# EAGLE board MagJack_Breakout-Panel-v12 (EAGLE 6.6.0)
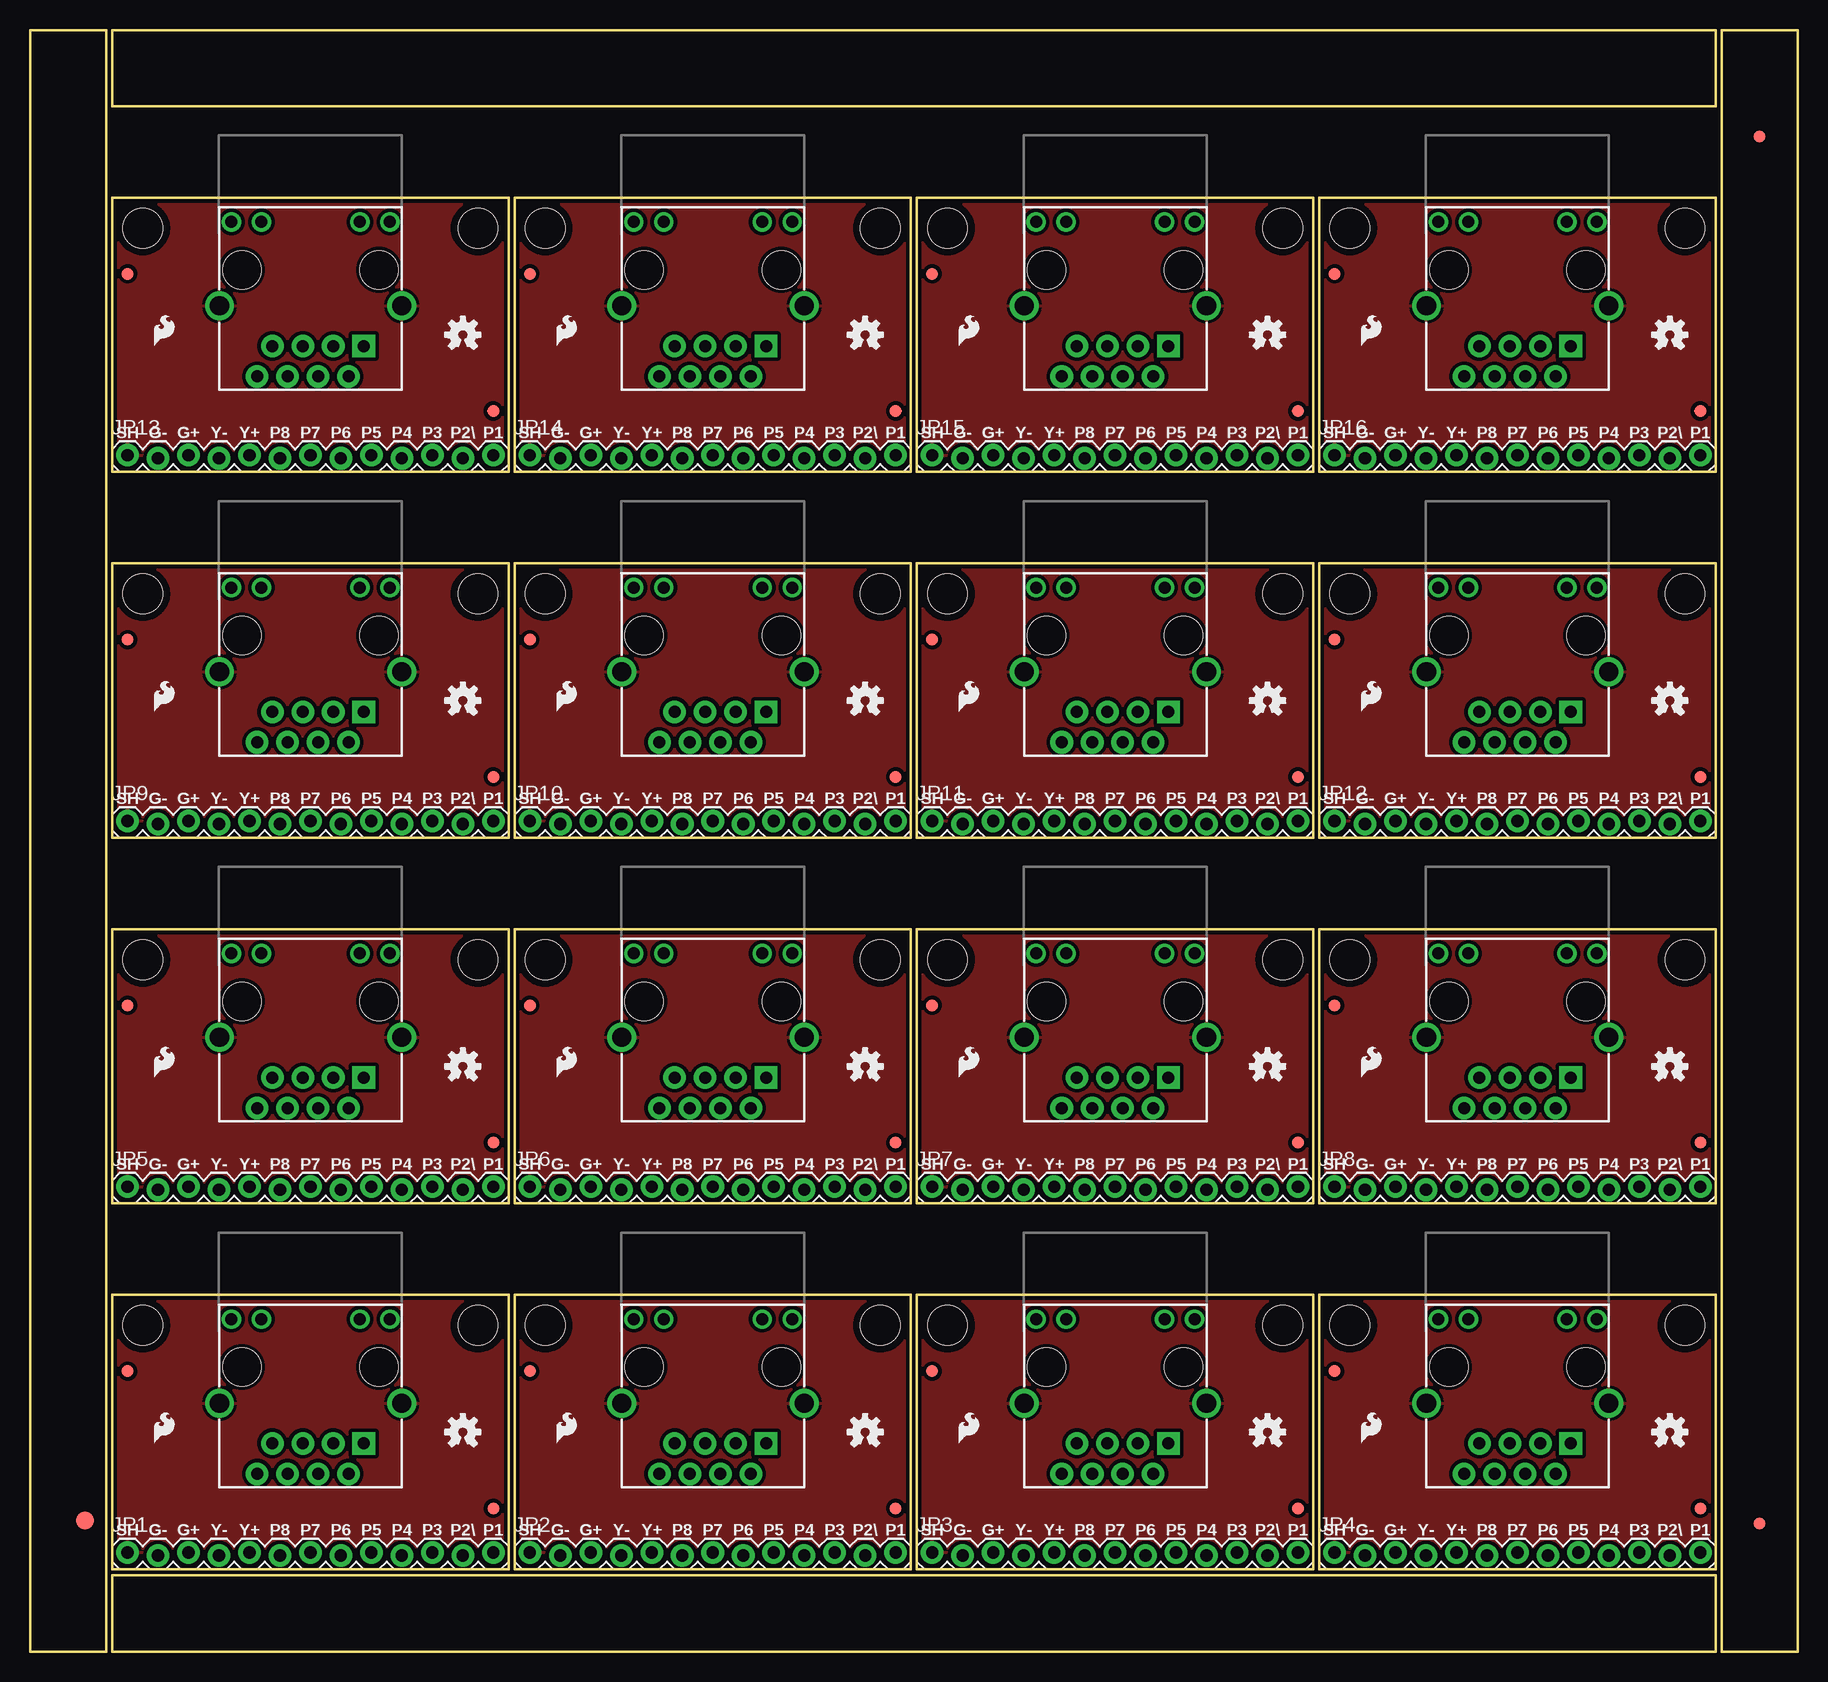
[diagram p0: board, top side]
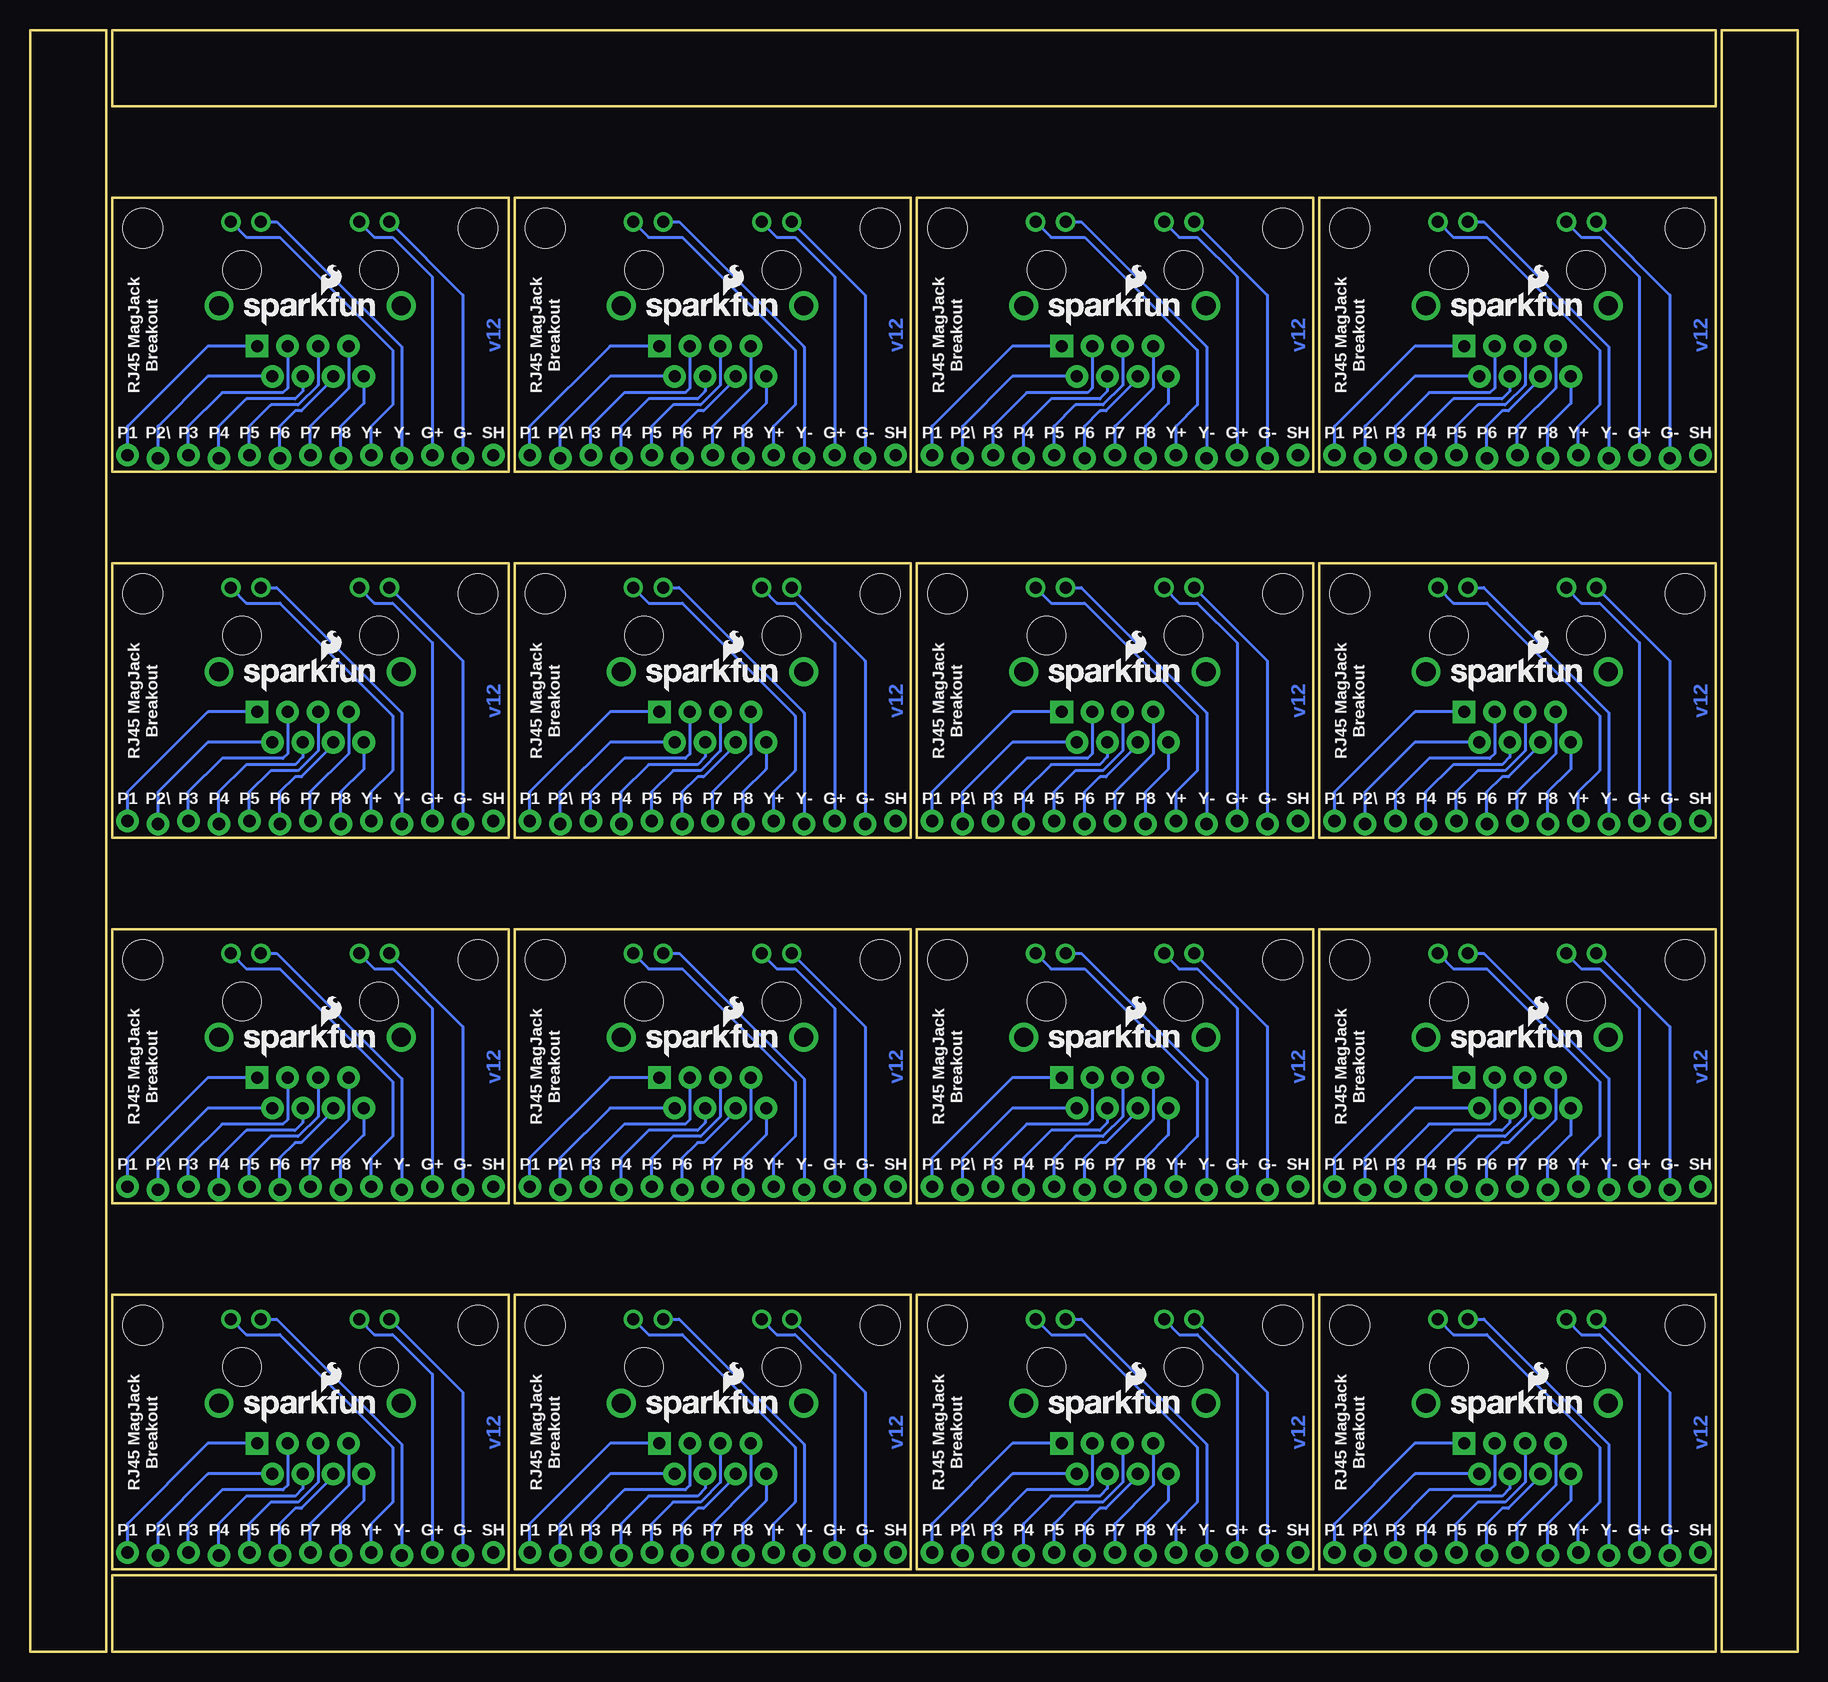
[diagram p1: board, bottom side, seen from below]

Size 147.32 x 135.13 mm. Coordinates in mm from the lower left corner, seen from the top.
Outline: 6.86,6.86 6.86,29.72 39.88,29.72 39.88,6.86 6.86,6.86
Outline: 40.39,6.86 40.39,29.72 73.41,29.72 73.41,6.86 40.39,6.86
Outline: 73.91,6.86 73.91,29.72 106.93,29.72 106.93,6.86 73.91,6.86
Outline: 107.44,6.86 107.44,29.72 140.46,29.72 140.46,6.86 107.44,6.86
Outline: 6.86,37.34 6.86,60.2 39.88,60.2 39.88,37.34 6.86,37.34
Outline: 40.39,37.34 40.39,60.2 73.41,60.2 73.41,37.34 40.39,37.34
Outline: 73.91,37.34 73.91,60.2 106.93,60.2 106.93,37.34 73.91,37.34
Outline: 107.44,37.34 107.44,60.2 140.46,60.2 140.46,37.34 107.44,37.34
Outline: 6.86,67.82 6.86,90.68 39.88,90.68 39.88,67.82 6.86,67.82
Outline: 40.39,67.82 40.39,90.68 73.41,90.68 73.41,67.82 40.39,67.82
Outline: 73.91,67.82 73.91,90.68 106.93,90.68 106.93,67.82 73.91,67.82
Outline: 107.44,67.82 107.44,90.68 140.46,90.68 140.46,67.82 107.44,67.82
Outline: 6.86,98.3 6.86,121.16 39.88,121.16 39.88,98.3 6.86,98.3
Outline: 40.39,98.3 40.39,121.16 73.41,121.16 73.41,98.3 40.39,98.3
Outline: 73.91,98.3 73.91,121.16 106.93,121.16 106.93,98.3 73.91,98.3
Outline: 107.44,98.3 107.44,121.16 140.46,121.16 140.46,98.3 107.44,98.3
Outline: 6.35,0 6.35,135.13 0,135.13 0,0 6.35,0
Outline: 6.86,0 140.46,0 140.46,6.35 6.86,6.35 6.86,0
Outline: 147.32,0 147.32,135.13 140.97,135.13 140.97,0 147.32,0
Outline: 6.86,128.78 140.46,128.78 140.46,135.13 6.86,135.13 6.86,128.78
Copper layers (1*16): Top 0.035mm / dielectric 1.5mm / Bottom 0.035mm
Design rules "SparkFun-2-layer": minimum track width 7mil, minimum drill 15mil, track to track 8mil, track to pad 8mil, pad to pad 8mil, via to via 8mil, smd to smd 8mil, copper to edge 8mil, drill to drill 8mil, minimum pad ring 12mil, minimum via ring 10mil, stop-mask expansion 4mil, vias tented up to drill 20mil, thermal gap 10mil

## Footprints (pad centres in the part's own frame; a part is rotated, then mirrored left to right if it is on the bottom)
FIDUCIAL-1.5X3 = smd 1.5 x 1.5: 1 0,0
FIDUCIAL-1X2 = smd 1 x 1: 1 0,0
MAGJACK = drill 1 pad 1.88 square: 1 3.175,17.445 | drill 1 pad 1.88: 2 4.445,19.985; 3 5.715,17.445; 4 6.985,19.985; 5 8.255,17.445; 6 9.525,19.985; 7 10.795,17.445; 8 12.065,19.985 | drill 1 pad 1.27: 9 1,7.1; 10 3.5,7.1; 11 11.7,7.1; 12 14.2,7.1 | drill 1.6 pad 2.184: M1 0,14.1; M2 15.2,14.1 | hole 3.2: 1.905,11.095; 13.335,11.095
1X13_LOCK = drill 1.016 pad 1.88: 1 0,0.127; 2 2.54,-0.127; 3 5.08,0.127; 4 7.62,-0.127; 5 10.16,0.127; 6 12.7,-0.127; 7 15.24,0.127; 8 17.78,-0.127; 9 20.32,0.127; 10 22.86,-0.127; 11 25.4,0.127; 12 27.94,-0.127; 13 30.48,0.127
STAND-OFF = hole 3.302: 0,0

## Placement (x,y rotation side)
E$1  [FIDUCIAL-1.5X3]  4.57,10.92 0 top
E$4  [FIDUCIAL-1X2]  144.15,10.67 0 top
E$7  [FIDUCIAL-1X2]  144.15,126.24 180 top
FID1  FIDUCIAL1X2  [FIDUCIAL-1X2]  8.13,23.37 0 top
FID2  FIDUCIAL1X2  [FIDUCIAL-1X2]  38.61,11.94 0 top
FID3  FIDUCIAL1X2  [FIDUCIAL-1X2]  41.66,23.37 0 top
FID4  FIDUCIAL1X2  [FIDUCIAL-1X2]  72.14,11.94 0 top
FID5  FIDUCIAL1X2  [FIDUCIAL-1X2]  75.18,23.37 0 top
FID6  FIDUCIAL1X2  [FIDUCIAL-1X2]  105.66,11.94 0 top
FID7  FIDUCIAL1X2  [FIDUCIAL-1X2]  108.71,23.37 0 top
FID8  FIDUCIAL1X2  [FIDUCIAL-1X2]  139.19,11.94 0 top
FID9  FIDUCIAL1X2  [FIDUCIAL-1X2]  8.13,53.85 0 top
FID10  FIDUCIAL1X2  [FIDUCIAL-1X2]  38.61,42.42 0 top
FID11  FIDUCIAL1X2  [FIDUCIAL-1X2]  41.66,53.85 0 top
FID12  FIDUCIAL1X2  [FIDUCIAL-1X2]  72.14,42.42 0 top
FID13  FIDUCIAL1X2  [FIDUCIAL-1X2]  75.18,53.85 0 top
FID14  FIDUCIAL1X2  [FIDUCIAL-1X2]  105.66,42.42 0 top
FID15  FIDUCIAL1X2  [FIDUCIAL-1X2]  108.71,53.85 0 top
FID16  FIDUCIAL1X2  [FIDUCIAL-1X2]  139.19,42.42 0 top
FID17  FIDUCIAL1X2  [FIDUCIAL-1X2]  8.13,84.33 0 top
FID18  FIDUCIAL1X2  [FIDUCIAL-1X2]  38.61,72.9 0 top
FID19  FIDUCIAL1X2  [FIDUCIAL-1X2]  41.66,84.33 0 top
FID20  FIDUCIAL1X2  [FIDUCIAL-1X2]  72.14,72.9 0 top
FID21  FIDUCIAL1X2  [FIDUCIAL-1X2]  75.18,84.33 0 top
FID22  FIDUCIAL1X2  [FIDUCIAL-1X2]  105.66,72.9 0 top
FID23  FIDUCIAL1X2  [FIDUCIAL-1X2]  108.71,84.33 0 top
FID24  FIDUCIAL1X2  [FIDUCIAL-1X2]  139.19,72.9 0 top
FID25  FIDUCIAL1X2  [FIDUCIAL-1X2]  8.13,114.81 0 top
FID26  FIDUCIAL1X2  [FIDUCIAL-1X2]  38.61,103.38 0 top
FID27  FIDUCIAL1X2  [FIDUCIAL-1X2]  41.66,114.81 0 top
FID28  FIDUCIAL1X2  [FIDUCIAL-1X2]  72.14,103.38 0 top
FID29  FIDUCIAL1X2  [FIDUCIAL-1X2]  75.18,114.81 0 top
FID30  FIDUCIAL1X2  [FIDUCIAL-1X2]  105.66,103.38 0 top
FID31  FIDUCIAL1X2  [FIDUCIAL-1X2]  108.71,114.81 0 top
FID32  FIDUCIAL1X2  [FIDUCIAL-1X2]  139.19,103.38 0 top
J1  MAGJACK-NOLABELS  [MAGJACK]  30.99,34.8 180 top
J2  MAGJACK-NOLABELS  [MAGJACK]  64.52,34.8 180 top
J3  MAGJACK-NOLABELS  [MAGJACK]  98.04,34.8 180 top
J4  MAGJACK-NOLABELS  [MAGJACK]  131.57,34.8 180 top
J5  MAGJACK-NOLABELS  [MAGJACK]  30.99,65.28 180 top
J6  MAGJACK-NOLABELS  [MAGJACK]  64.52,65.28 180 top
J7  MAGJACK-NOLABELS  [MAGJACK]  98.04,65.28 180 top
J8  MAGJACK-NOLABELS  [MAGJACK]  131.57,65.28 180 top
J9  MAGJACK-NOLABELS  [MAGJACK]  30.99,95.76 180 top
J10  MAGJACK-NOLABELS  [MAGJACK]  64.52,95.76 180 top
J11  MAGJACK-NOLABELS  [MAGJACK]  98.04,95.76 180 top
J12  MAGJACK-NOLABELS  [MAGJACK]  131.57,95.76 180 top
J13  MAGJACK-NOLABELS  [MAGJACK]  30.99,126.24 180 top
J14  MAGJACK-NOLABELS  [MAGJACK]  64.52,126.24 180 top
J15  MAGJACK-NOLABELS  [MAGJACK]  98.04,126.24 180 top
J16  MAGJACK-NOLABELS  [MAGJACK]  131.57,126.24 180 top
JP1  M13LOCK  [1X13_LOCK]  8.13,8.13 0 top
JP2  M13LOCK  [1X13_LOCK]  41.66,8.13 0 top
JP3  M13LOCK  [1X13_LOCK]  75.18,8.13 0 top
JP4  M13LOCK  [1X13_LOCK]  108.71,8.13 0 top
JP5  M13LOCK  [1X13_LOCK]  8.13,38.61 0 top
JP6  M13LOCK  [1X13_LOCK]  41.66,38.61 0 top
JP7  M13LOCK  [1X13_LOCK]  75.18,38.61 0 top
JP8  M13LOCK  [1X13_LOCK]  108.71,38.61 0 top
JP9  M13LOCK  [1X13_LOCK]  8.13,69.09 0 top
JP10  M13LOCK  [1X13_LOCK]  41.66,69.09 0 top
JP11  M13LOCK  [1X13_LOCK]  75.18,69.09 0 top
JP12  M13LOCK  [1X13_LOCK]  108.71,69.09 0 top
JP13  M13LOCK  [1X13_LOCK]  8.13,99.57 0 top
JP14  M13LOCK  [1X13_LOCK]  41.66,99.57 0 top
JP15  M13LOCK  [1X13_LOCK]  75.18,99.57 0 top
JP16  M13LOCK  [1X13_LOCK]  108.71,99.57 0 top
LOGO1  OSHW-LOGOS  [OSHW-LOGO-S]  36.07,18.29 0 top
LOGO2  SFE_LOGO_FLAME.1_INCH  [SFE_LOGO_FLAME_.1]  10.03,17.02 0 top
LOGO3  SFE_LOGO_NAME_FLAME.1_INCH  [SFE_LOGO_NAME_FLAME_.1]  29.34,18.92 0 bottom
LOGO4  OSHW-LOGOS  [OSHW-LOGO-S]  69.6,18.29 0 top
LOGO5  SFE_LOGO_FLAME.1_INCH  [SFE_LOGO_FLAME_.1]  43.56,17.02 0 top
LOGO6  SFE_LOGO_NAME_FLAME.1_INCH  [SFE_LOGO_NAME_FLAME_.1]  62.87,18.92 0 bottom
LOGO7  OSHW-LOGOS  [OSHW-LOGO-S]  103.12,18.29 0 top
LOGO8  SFE_LOGO_FLAME.1_INCH  [SFE_LOGO_FLAME_.1]  77.09,17.02 0 top
LOGO9  SFE_LOGO_NAME_FLAME.1_INCH  [SFE_LOGO_NAME_FLAME_.1]  96.39,18.92 0 bottom
LOGO10  OSHW-LOGOS  [OSHW-LOGO-S]  136.65,18.29 0 top
LOGO11  SFE_LOGO_FLAME.1_INCH  [SFE_LOGO_FLAME_.1]  110.62,17.02 0 top
LOGO12  SFE_LOGO_NAME_FLAME.1_INCH  [SFE_LOGO_NAME_FLAME_.1]  129.92,18.92 0 bottom
LOGO13  OSHW-LOGOS  [OSHW-LOGO-S]  36.07,48.77 0 top
LOGO14  SFE_LOGO_FLAME.1_INCH  [SFE_LOGO_FLAME_.1]  10.03,47.5 0 top
LOGO15  SFE_LOGO_NAME_FLAME.1_INCH  [SFE_LOGO_NAME_FLAME_.1]  29.34,49.4 0 bottom
LOGO16  OSHW-LOGOS  [OSHW-LOGO-S]  69.6,48.77 0 top
LOGO17  SFE_LOGO_FLAME.1_INCH  [SFE_LOGO_FLAME_.1]  43.56,47.5 0 top
LOGO18  SFE_LOGO_NAME_FLAME.1_INCH  [SFE_LOGO_NAME_FLAME_.1]  62.87,49.4 0 bottom
LOGO19  OSHW-LOGOS  [OSHW-LOGO-S]  103.12,48.77 0 top
LOGO20  SFE_LOGO_FLAME.1_INCH  [SFE_LOGO_FLAME_.1]  77.09,47.5 0 top
LOGO21  SFE_LOGO_NAME_FLAME.1_INCH  [SFE_LOGO_NAME_FLAME_.1]  96.39,49.4 0 bottom
LOGO22  OSHW-LOGOS  [OSHW-LOGO-S]  136.65,48.77 0 top
LOGO23  SFE_LOGO_FLAME.1_INCH  [SFE_LOGO_FLAME_.1]  110.62,47.5 0 top
LOGO24  SFE_LOGO_NAME_FLAME.1_INCH  [SFE_LOGO_NAME_FLAME_.1]  129.92,49.4 0 bottom
LOGO25  OSHW-LOGOS  [OSHW-LOGO-S]  36.07,79.25 0 top
LOGO26  SFE_LOGO_FLAME.1_INCH  [SFE_LOGO_FLAME_.1]  10.03,77.98 0 top
LOGO27  SFE_LOGO_NAME_FLAME.1_INCH  [SFE_LOGO_NAME_FLAME_.1]  29.34,79.88 0 bottom
LOGO28  OSHW-LOGOS  [OSHW-LOGO-S]  69.6,79.25 0 top
LOGO29  SFE_LOGO_FLAME.1_INCH  [SFE_LOGO_FLAME_.1]  43.56,77.98 0 top
LOGO30  SFE_LOGO_NAME_FLAME.1_INCH  [SFE_LOGO_NAME_FLAME_.1]  62.87,79.88 0 bottom
LOGO31  OSHW-LOGOS  [OSHW-LOGO-S]  103.12,79.25 0 top
LOGO32  SFE_LOGO_FLAME.1_INCH  [SFE_LOGO_FLAME_.1]  77.09,77.98 0 top
LOGO33  SFE_LOGO_NAME_FLAME.1_INCH  [SFE_LOGO_NAME_FLAME_.1]  96.39,79.88 0 bottom
LOGO34  OSHW-LOGOS  [OSHW-LOGO-S]  136.65,79.25 0 top
LOGO35  SFE_LOGO_FLAME.1_INCH  [SFE_LOGO_FLAME_.1]  110.62,77.98 0 top
LOGO36  SFE_LOGO_NAME_FLAME.1_INCH  [SFE_LOGO_NAME_FLAME_.1]  129.92,79.88 0 bottom
LOGO37  OSHW-LOGOS  [OSHW-LOGO-S]  36.07,109.73 0 top
LOGO38  SFE_LOGO_FLAME.1_INCH  [SFE_LOGO_FLAME_.1]  10.03,108.46 0 top
LOGO39  SFE_LOGO_NAME_FLAME.1_INCH  [SFE_LOGO_NAME_FLAME_.1]  29.34,110.36 0 bottom
LOGO40  OSHW-LOGOS  [OSHW-LOGO-S]  69.6,109.73 0 top
LOGO41  SFE_LOGO_FLAME.1_INCH  [SFE_LOGO_FLAME_.1]  43.56,108.46 0 top
LOGO42  SFE_LOGO_NAME_FLAME.1_INCH  [SFE_LOGO_NAME_FLAME_.1]  62.87,110.36 0 bottom
LOGO43  OSHW-LOGOS  [OSHW-LOGO-S]  103.12,109.73 0 top
LOGO44  SFE_LOGO_FLAME.1_INCH  [SFE_LOGO_FLAME_.1]  77.09,108.46 0 top
LOGO45  SFE_LOGO_NAME_FLAME.1_INCH  [SFE_LOGO_NAME_FLAME_.1]  96.39,110.36 0 bottom
LOGO46  OSHW-LOGOS  [OSHW-LOGO-S]  136.65,109.73 0 top
LOGO47  SFE_LOGO_FLAME.1_INCH  [SFE_LOGO_FLAME_.1]  110.62,108.46 0 top
LOGO48  SFE_LOGO_NAME_FLAME.1_INCH  [SFE_LOGO_NAME_FLAME_.1]  129.92,110.36 0 bottom
STANDOFF1  STAND-OFF  [STAND-OFF]  70.87,27.18 0 top
STANDOFF2  STAND-OFF  [STAND-OFF]  42.93,27.18 0 top
STANDOFF3  STAND-OFF  [STAND-OFF]  37.34,27.18 0 top
STANDOFF4  STAND-OFF  [STAND-OFF]  104.39,27.18 0 top
STANDOFF5  STAND-OFF  [STAND-OFF]  9.4,27.18 0 top
STANDOFF6  STAND-OFF  [STAND-OFF]  76.45,27.18 0 top
STANDOFF7  STAND-OFF  [STAND-OFF]  137.92,27.18 0 top
STANDOFF8  STAND-OFF  [STAND-OFF]  109.98,27.18 0 top
STANDOFF9  STAND-OFF  [STAND-OFF]  37.34,57.66 0 top
STANDOFF10  STAND-OFF  [STAND-OFF]  9.4,57.66 0 top
STANDOFF11  STAND-OFF  [STAND-OFF]  70.87,57.66 0 top
STANDOFF12  STAND-OFF  [STAND-OFF]  42.93,57.66 0 top
STANDOFF13  STAND-OFF  [STAND-OFF]  104.39,57.66 0 top
STANDOFF14  STAND-OFF  [STAND-OFF]  76.45,57.66 0 top
STANDOFF15  STAND-OFF  [STAND-OFF]  137.92,57.66 0 top
STANDOFF16  STAND-OFF  [STAND-OFF]  109.98,57.66 0 top
STANDOFF17  STAND-OFF  [STAND-OFF]  37.34,88.14 0 top
STANDOFF18  STAND-OFF  [STAND-OFF]  9.4,88.14 0 top
STANDOFF19  STAND-OFF  [STAND-OFF]  70.87,88.14 0 top
STANDOFF20  STAND-OFF  [STAND-OFF]  42.93,88.14 0 top
STANDOFF21  STAND-OFF  [STAND-OFF]  104.39,88.14 0 top
STANDOFF22  STAND-OFF  [STAND-OFF]  76.45,88.14 0 top
STANDOFF23  STAND-OFF  [STAND-OFF]  137.92,88.14 0 top
STANDOFF24  STAND-OFF  [STAND-OFF]  109.98,88.14 0 top
STANDOFF25  STAND-OFF  [STAND-OFF]  37.34,118.62 0 top
STANDOFF26  STAND-OFF  [STAND-OFF]  9.4,118.62 0 top
STANDOFF27  STAND-OFF  [STAND-OFF]  70.87,118.62 0 top
STANDOFF28  STAND-OFF  [STAND-OFF]  42.93,118.62 0 top
STANDOFF29  STAND-OFF  [STAND-OFF]  104.39,118.62 0 top
STANDOFF30  STAND-OFF  [STAND-OFF]  76.45,118.62 0 top
STANDOFF31  STAND-OFF  [STAND-OFF]  137.92,118.62 0 top
STANDOFF32  STAND-OFF  [STAND-OFF]  109.98,118.62 0 top

## Library data of the parts
E$1 = SparkFun-Retired
E$4 E$7 FID1-FID32 LOGO1-LOGO48 = SparkFun-Aesthetics
J1-J16 = SparkFun-Connectors; PROD_ID: CONN-09556
JP1-JP16 = SparkFun-Connectors
STANDOFF1-STANDOFF32 = SparkFun-Electromechanical

## Nets
G+: J1.11 JP1.3
G+1: J2.11 JP2.3
G+2: J3.11 JP3.3
G+3: J4.11 JP4.3
G+4: J5.11 JP5.3
G+5: J6.11 JP6.3
G+6: J7.11 JP7.3
G+7: J8.11 JP8.3
G+8: J9.11 JP9.3
G+9: J10.11 JP10.3
G+10: J11.11 JP11.3
G+11: J12.11 JP12.3
G+12: J13.11 JP13.3
G+13: J14.11 JP14.3
G+14: J15.11 JP15.3
G+15: J16.11 JP16.3
G-: J1.12 JP1.2
G-1: J2.12 JP2.2
G-2: J3.12 JP3.2
G-3: J4.12 JP4.2
G-4: J5.12 JP5.2
G-5: J6.12 JP6.2
G-6: J7.12 JP7.2
G-7: J8.12 JP8.2
G-8: J9.12 JP9.2
G-9: J10.12 JP10.2
G-10: J11.12 JP11.2
G-11: J12.12 JP12.2
G-12: J13.12 JP13.2
G-13: J14.12 JP14.2
G-14: J15.12 JP15.2
G-15: J16.12 JP16.2
P1: J1.1 JP1.13
P2: J1.2 JP1.12
P3: J1.3 JP1.11
P4: J1.4 JP1.10
P5: J1.5 JP1.9
P6: J1.6 JP1.8
P7: J1.7 JP1.7
P8: J1.8 JP1.6
P9: J2.1 JP2.13
P10: J2.2 JP2.12
P11: J2.3 JP2.11
P12: J2.4 JP2.10
P13: J2.5 JP2.9
P14: J2.6 JP2.8
P15: J2.7 JP2.7
P16: J2.8 JP2.6
P17: J3.1 JP3.13
P18: J3.2 JP3.12
P19: J3.3 JP3.11
P20: J3.4 JP3.10
P21: J3.5 JP3.9
P22: J3.6 JP3.8
P23: J3.7 JP3.7
P24: J3.8 JP3.6
P25: J4.1 JP4.13
P26: J4.2 JP4.12
P27: J4.3 JP4.11
P28: J4.4 JP4.10
P29: J4.5 JP4.9
P30: J4.6 JP4.8
P31: J4.7 JP4.7
P32: J4.8 JP4.6
P33: J5.1 JP5.13
P34: J5.2 JP5.12
P35: J5.3 JP5.11
P36: J5.4 JP5.10
P37: J5.5 JP5.9
P38: J5.6 JP5.8
P39: J5.7 JP5.7
P40: J5.8 JP5.6
P41: J6.1 JP6.13
P42: J6.2 JP6.12
P43: J6.3 JP6.11
P44: J6.4 JP6.10
P45: J6.5 JP6.9
P46: J6.6 JP6.8
P47: J6.7 JP6.7
P48: J6.8 JP6.6
P49: J7.1 JP7.13
P50: J7.2 JP7.12
P51: J7.3 JP7.11
P52: J7.4 JP7.10
P53: J7.5 JP7.9
P54: J7.6 JP7.8
P55: J7.7 JP7.7
P56: J7.8 JP7.6
P57: J8.1 JP8.13
P58: J8.2 JP8.12
P59: J8.3 JP8.11
P60: J8.4 JP8.10
P61: J8.5 JP8.9
P62: J8.6 JP8.8
P63: J8.7 JP8.7
P64: J8.8 JP8.6
P65: J9.1 JP9.13
P66: J9.2 JP9.12
P67: J9.3 JP9.11
P68: J9.4 JP9.10
P69: J9.5 JP9.9
P70: J9.6 JP9.8
P71: J9.7 JP9.7
P72: J9.8 JP9.6
P73: J10.1 JP10.13
P74: J10.2 JP10.12
P75: J10.3 JP10.11
P76: J10.4 JP10.10
P77: J10.5 JP10.9
P78: J10.6 JP10.8
P79: J10.7 JP10.7
P80: J10.8 JP10.6
P81: J11.1 JP11.13
P82: J11.2 JP11.12
P83: J11.3 JP11.11
P84: J11.4 JP11.10
P85: J11.5 JP11.9
P86: J11.6 JP11.8
P87: J11.7 JP11.7
P88: J11.8 JP11.6
P89: J12.1 JP12.13
P90: J12.2 JP12.12
P91: J12.3 JP12.11
P92: J12.4 JP12.10
P93: J12.5 JP12.9
P94: J12.6 JP12.8
P95: J12.7 JP12.7
P96: J12.8 JP12.6
P97: J13.1 JP13.13
P98: J13.2 JP13.12
P99: J13.3 JP13.11
P100: J13.4 JP13.10
P101: J13.5 JP13.9
P102: J13.6 JP13.8
P103: J13.7 JP13.7
P104: J13.8 JP13.6
P105: J14.1 JP14.13
P106: J14.2 JP14.12
P107: J14.3 JP14.11
P108: J14.4 JP14.10
P109: J14.5 JP14.9
P110: J14.6 JP14.8
P111: J14.7 JP14.7
P112: J14.8 JP14.6
P113: J15.1 JP15.13
P114: J15.2 JP15.12
P115: J15.3 JP15.11
P116: J15.4 JP15.10
P117: J15.5 JP15.9
P118: J15.6 JP15.8
P119: J15.7 JP15.7
P120: J15.8 JP15.6
P121: J16.1 JP16.13
P122: J16.2 JP16.12
P123: J16.3 JP16.11
P124: J16.4 JP16.10
P125: J16.5 JP16.9
P126: J16.6 JP16.8
P127: J16.7 JP16.7
P128: J16.8 JP16.6
SH: J1.M1 J1.M2 JP1.1
SH1: J2.M1 J2.M2 JP2.1
SH2: J3.M1 J3.M2 JP3.1
SH3: J4.M1 J4.M2 JP4.1
SH4: J5.M1 J5.M2 JP5.1
SH5: J6.M1 J6.M2 JP6.1
SH6: J7.M1 J7.M2 JP7.1
SH7: J8.M1 J8.M2 JP8.1
SH8: J9.M1 J9.M2 JP9.1
SH9: J10.M1 J10.M2 JP10.1
SH10: J11.M1 J11.M2 JP11.1
SH11: J12.M1 J12.M2 JP12.1
SH12: J13.M1 J13.M2 JP13.1
SH13: J14.M1 J14.M2 JP14.1
SH14: J15.M1 J15.M2 JP15.1
SH15: J16.M1 J16.M2 JP16.1
Y+: J1.9 JP1.5
Y+1: J2.9 JP2.5
Y+2: J3.9 JP3.5
Y+3: J4.9 JP4.5
Y+4: J5.9 JP5.5
Y+5: J6.9 JP6.5
Y+6: J7.9 JP7.5
Y+7: J8.9 JP8.5
Y+8: J9.9 JP9.5
Y+9: J10.9 JP10.5
Y+10: J11.9 JP11.5
Y+11: J12.9 JP12.5
Y+12: J13.9 JP13.5
Y+13: J14.9 JP14.5
Y+14: J15.9 JP15.5
Y+15: J16.9 JP16.5
Y-: J1.10 JP1.4
Y-1: J2.10 JP2.4
Y-2: J3.10 JP3.4
Y-3: J4.10 JP4.4
Y-4: J5.10 JP5.4
Y-5: J6.10 JP6.4
Y-6: J7.10 JP7.4
Y-7: J8.10 JP8.4
Y-8: J9.10 JP9.4
Y-9: J10.10 JP10.4
Y-10: J11.10 JP11.4
Y-11: J12.10 JP12.4
Y-12: J13.10 JP13.4
Y-13: J14.10 JP14.4
Y-14: J15.10 JP15.4
Y-15: J16.10 JP16.4

## Tracks (layer width: path | path; a pad name or v marks a point on that pad's centre or on a via)
G+
  Bottom 0.254: J1.11 19.29,27.67 18.03,26.42 16.51,26.42 13.21,23.11 JP1.3
G+1
  Bottom 0.254: J2.11 52.82,27.67 51.56,26.42 50.04,26.42 46.74,23.11 JP2.3
G+2
  Bottom 0.254: J3.11 86.34,27.67 85.09,26.42 83.57,26.42 80.26,23.11 JP3.3
G+3
  Bottom 0.254: J4.11 119.87,27.67 118.62,26.42 117.09,26.42 113.79,23.11 JP4.3
G+4
  Bottom 0.254: J5.11 19.29,58.15 18.03,56.9 16.51,56.9 13.21,53.59 JP5.3
G+5
  Bottom 0.254: J6.11 52.82,58.15 51.56,56.9 50.04,56.9 46.74,53.59 JP6.3
G+6
  Bottom 0.254: J7.11 86.34,58.15 85.09,56.9 83.57,56.9 80.26,53.59 JP7.3
G+7
  Bottom 0.254: J8.11 119.87,58.15 118.62,56.9 117.09,56.9 113.79,53.59 JP8.3
G+8
  Bottom 0.254: J9.11 19.29,88.63 18.03,87.38 16.51,87.38 13.21,84.07 JP9.3
G+9
  Bottom 0.254: J10.11 52.82,88.63 51.56,87.38 50.04,87.38 46.74,84.07 JP10.3
G+10
  Bottom 0.254: J11.11 86.34,88.63 85.09,87.38 83.57,87.38 80.26,84.07 JP11.3
G+11
  Bottom 0.254: J12.11 119.87,88.63 118.62,87.38 117.09,87.38 113.79,84.07 JP12.3
G+12
  Bottom 0.254: J13.11 19.29,119.11 18.03,117.86 16.51,117.86 13.21,114.55 JP13.3
G+13
  Bottom 0.254: J14.11 52.82,119.11 51.56,117.86 50.04,117.86 46.74,114.55 JP14.3
G+14
  Bottom 0.254: J15.11 86.34,119.11 85.09,117.86 83.57,117.86 80.26,114.55 JP15.3
G+15
  Bottom 0.254: J16.11 119.87,119.11 118.62,117.86 117.09,117.86 113.79,114.55 JP16.3
G-
  Bottom 0.254: J1.12 16.78,27.7 10.67,21.59 JP1.2
G-1
  Bottom 0.254: J2.12 50.3,27.7 44.2,21.59 JP2.2
G-2
  Bottom 0.254: J3.12 77.72,21.59 JP3.2
G-3
  Bottom 0.254: J4.12 111.25,21.59 JP4.2
G-4
  Bottom 0.254: J5.12 16.78,58.18 10.67,52.07 JP5.2
G-5
  Bottom 0.254: J6.12 50.3,58.18 44.2,52.07 JP6.2
G-6
  Bottom 0.254: J7.12 77.72,52.07 JP7.2
G-7
  Bottom 0.254: J8.12 111.25,52.07 JP8.2
G-8
  Bottom 0.254: J9.12 16.78,88.66 10.67,82.55 JP9.2
G-9
  Bottom 0.254: J10.12 50.3,88.66 44.2,82.55 JP10.2
G-10
  Bottom 0.254: J11.12 77.72,82.55 JP11.2
G-11
  Bottom 0.254: J12.12 111.25,82.55 JP12.2
G-12
  Bottom 0.254: J13.12 16.78,119.14 10.67,113.03 JP13.2
G-13
  Bottom 0.254: J14.12 50.3,119.14 44.2,113.03 JP14.2
G-14
  Bottom 0.254: J15.12 77.72,113.03 JP15.2
G-15
  Bottom 0.254: J16.12 111.25,113.03 JP16.2
P1
  Bottom 0.254: J1.1 31.92,17.35 38.61,10.67 JP1.13
P2
  Bottom 0.254: J1.2 31.92,14.81 36.07,10.67 JP1.12
P3
  Bottom 0.254: J1.3 25.27,13.84 25.65,13.46 30.73,13.46 33.53,10.67 JP1.11
P4
  Bottom 0.254: J1.4 24,13.59 24.64,12.95 28.7,12.95 30.99,10.67 JP1.10
P5
  Bottom 0.254: J1.5 22.73,14.1 24.38,12.45 26.67,12.45 28.45,10.67 JP1.9
P6
  Bottom 0.254: J1.6 21.46,14.61 24.13,11.94 24.64,11.94 25.91,10.67 JP1.8
P7
  Bottom 0.254: J1.7 20.19,13.84 23.37,10.67 JP1.7
P8
  Bottom 0.254: J1.8 18.92,12.57 20.83,10.67 JP1.6
P9
  Bottom 0.254: J2.1 65.45,17.35 72.14,10.67 JP2.13
P10
  Bottom 0.254: J2.2 65.45,14.81 69.6,10.67 JP2.12
P11
  Bottom 0.254: J2.3 58.8,13.84 59.18,13.46 64.26,13.46 67.06,10.67 JP2.11
P12
  Bottom 0.254: J2.4 57.53,13.59 58.17,12.95 62.23,12.95 64.52,10.67 JP2.10
P13
  Bottom 0.254: J2.5 56.26,14.1 57.91,12.45 60.2,12.45 61.98,10.67 JP2.9
P14
  Bottom 0.254: J2.6 54.99,14.61 57.66,11.94 58.17,11.94 59.44,10.67 JP2.8
P15
  Bottom 0.254: J2.7 53.72,13.84 56.9,10.67 JP2.7
P16
  Bottom 0.254: J2.8 52.45,12.57 54.36,10.67 JP2.6
P17
  Bottom 0.254: J3.1 98.98,17.35 105.66,10.67 JP3.13
P18
  Bottom 0.254: J3.2 98.98,14.81 103.12,10.67 JP3.12
P19
  Bottom 0.254: J3.3 92.33,13.84 92.71,13.46 97.79,13.46 100.58,10.67 JP3.11
P20
  Bottom 0.254: J3.4 91.06,13.59 91.69,12.95 95.76,12.95 98.04,10.67 JP3.10
P21
  Bottom 0.254: J3.5 89.79,14.1 91.44,12.45 93.73,12.45 95.5,10.67 JP3.9
P22
  Bottom 0.254: J3.6 88.52,14.61 91.19,11.94 91.69,11.94 92.96,10.67 JP3.8
P23
  Bottom 0.254: J3.7 87.25,13.84 90.42,10.67 JP3.7
P24
  Bottom 0.254: J3.8 85.98,12.57 87.88,10.67 JP3.6
P25
  Bottom 0.254: J4.1 132.51,17.35 139.19,10.67 JP4.13
P26
  Bottom 0.254: J4.2 132.51,14.81 136.65,10.67 JP4.12
P27
  Bottom 0.254: J4.3 125.86,13.84 126.24,13.46 131.32,13.46 134.11,10.67 JP4.11
P28
  Bottom 0.254: J4.4 124.59,13.59 125.22,12.95 129.29,12.95 131.57,10.67 JP4.10
P29
  Bottom 0.254: J4.5 123.32,14.1 124.97,12.45 127.25,12.45 129.03,10.67 JP4.9
P30
  Bottom 0.254: J4.6 122.05,14.61 124.71,11.94 125.22,11.94 126.49,10.67 JP4.8
P31
  Bottom 0.254: J4.7 120.78,13.84 123.95,10.67 JP4.7
P32
  Bottom 0.254: J4.8 119.51,12.57 121.41,10.67 JP4.6
P33
  Bottom 0.254: J5.1 31.92,47.83 38.61,41.15 JP5.13
P34
  Bottom 0.254: J5.2 31.92,45.29 36.07,41.15 JP5.12
P35
  Bottom 0.254: J5.3 25.27,44.32 25.65,43.94 30.73,43.94 33.53,41.15 JP5.11
P36
  Bottom 0.254: J5.4 24,44.07 24.64,43.43 28.7,43.43 30.99,41.15 JP5.10
P37
  Bottom 0.254: J5.5 22.73,44.58 24.38,42.93 26.67,42.93 28.45,41.15 JP5.9
P38
  Bottom 0.254: J5.6 21.46,45.09 24.13,42.42 24.64,42.42 25.91,41.15 JP5.8
P39
  Bottom 0.254: J5.7 20.19,44.32 23.37,41.15 JP5.7
P40
  Bottom 0.254: J5.8 18.92,43.05 20.83,41.15 JP5.6
P41
  Bottom 0.254: J6.1 65.45,47.83 72.14,41.15 JP6.13
P42
  Bottom 0.254: J6.2 65.45,45.29 69.6,41.15 JP6.12
P43
  Bottom 0.254: J6.3 58.8,44.32 59.18,43.94 64.26,43.94 67.06,41.15 JP6.11
P44
  Bottom 0.254: J6.4 57.53,44.07 58.17,43.43 62.23,43.43 64.52,41.15 JP6.10
P45
  Bottom 0.254: J6.5 56.26,44.58 57.91,42.93 60.2,42.93 61.98,41.15 JP6.9
P46
  Bottom 0.254: J6.6 54.99,45.09 57.66,42.42 58.17,42.42 59.44,41.15 JP6.8
P47
  Bottom 0.254: J6.7 53.72,44.32 56.9,41.15 JP6.7
P48
  Bottom 0.254: J6.8 52.45,43.05 54.36,41.15 JP6.6
P49
  Bottom 0.254: J7.1 98.98,47.83 105.66,41.15 JP7.13
P50
  Bottom 0.254: J7.2 98.98,45.29 103.12,41.15 JP7.12
P51
  Bottom 0.254: J7.3 92.33,44.32 92.71,43.94 97.79,43.94 100.58,41.15 JP7.11
P52
  Bottom 0.254: J7.4 91.06,44.07 91.69,43.43 95.76,43.43 98.04,41.15 JP7.10
P53
  Bottom 0.254: J7.5 89.79,44.58 91.44,42.93 93.73,42.93 95.5,41.15 JP7.9
P54
  Bottom 0.254: J7.6 88.52,45.09 91.19,42.42 91.69,42.42 92.96,41.15 JP7.8
P55
  Bottom 0.254: J7.7 87.25,44.32 90.42,41.15 JP7.7
P56
  Bottom 0.254: J7.8 85.98,43.05 87.88,41.15 JP7.6
P57
  Bottom 0.254: J8.1 132.51,47.83 139.19,41.15 JP8.13
P58
  Bottom 0.254: J8.2 132.51,45.29 136.65,41.15 JP8.12
P59
  Bottom 0.254: J8.3 125.86,44.32 126.24,43.94 131.32,43.94 134.11,41.15 JP8.11
P60
  Bottom 0.254: J8.4 124.59,44.07 125.22,43.43 129.29,43.43 131.57,41.15 JP8.10
P61
  Bottom 0.254: J8.5 123.32,44.58 124.97,42.93 127.25,42.93 129.03,41.15 JP8.9
P62
  Bottom 0.254: J8.6 122.05,45.09 124.71,42.42 125.22,42.42 126.49,41.15 JP8.8
P63
  Bottom 0.254: J8.7 120.78,44.32 123.95,41.15 JP8.7
P64
  Bottom 0.254: J8.8 119.51,43.05 121.41,41.15 JP8.6
P65
  Bottom 0.254: J9.1 31.92,78.31 38.61,71.63 JP9.13
P66
  Bottom 0.254: J9.2 31.92,75.77 36.07,71.63 JP9.12
P67
  Bottom 0.254: J9.3 25.27,74.8 25.65,74.42 30.73,74.42 33.53,71.63 JP9.11
P68
  Bottom 0.254: J9.4 24,74.55 24.64,73.91 28.7,73.91 30.99,71.63 JP9.10
P69
  Bottom 0.254: J9.5 22.73,75.06 24.38,73.41 26.67,73.41 28.45,71.63 JP9.9
P70
  Bottom 0.254: J9.6 21.46,75.56 24.13,72.9 24.64,72.9 25.91,71.63 JP9.8
P71
  Bottom 0.254: J9.7 20.19,74.8 23.37,71.63 JP9.7
P72
  Bottom 0.254: J9.8 18.92,73.53 20.83,71.63 JP9.6
P73
  Bottom 0.254: J10.1 65.45,78.31 72.14,71.63 JP10.13
P74
  Bottom 0.254: J10.2 65.45,75.77 69.6,71.63 JP10.12
P75
  Bottom 0.254: J10.3 58.8,74.8 59.18,74.42 64.26,74.42 67.06,71.63 JP10.11
P76
  Bottom 0.254: J10.4 57.53,74.55 58.17,73.91 62.23,73.91 64.52,71.63 JP10.10
P77
  Bottom 0.254: J10.5 56.26,75.06 57.91,73.41 60.2,73.41 61.98,71.63 JP10.9
P78
  Bottom 0.254: J10.6 54.99,75.56 57.66,72.9 58.17,72.9 59.44,71.63 JP10.8
P79
  Bottom 0.254: J10.7 53.72,74.8 56.9,71.63 JP10.7
P80
  Bottom 0.254: J10.8 52.45,73.53 54.36,71.63 JP10.6
P81
  Bottom 0.254: J11.1 98.98,78.31 105.66,71.63 JP11.13
P82
  Bottom 0.254: J11.2 98.98,75.77 103.12,71.63 JP11.12
P83
  Bottom 0.254: J11.3 92.33,74.8 92.71,74.42 97.79,74.42 100.58,71.63 JP11.11
P84
  Bottom 0.254: J11.4 91.06,74.55 91.69,73.91 95.76,73.91 98.04,71.63 JP11.10
P85
  Bottom 0.254: J11.5 89.79,75.06 91.44,73.41 93.73,73.41 95.5,71.63 JP11.9
P86
  Bottom 0.254: J11.6 88.52,75.56 91.19,72.9 91.69,72.9 92.96,71.63 JP11.8
P87
  Bottom 0.254: J11.7 87.25,74.8 90.42,71.63 JP11.7
P88
  Bottom 0.254: J11.8 85.98,73.53 87.88,71.63 JP11.6
P89
  Bottom 0.254: J12.1 132.51,78.31 139.19,71.63 JP12.13
P90
  Bottom 0.254: J12.2 132.51,75.77 136.65,71.63 JP12.12
P91
  Bottom 0.254: J12.3 125.86,74.8 126.24,74.42 131.32,74.42 134.11,71.63 JP12.11
P92
  Bottom 0.254: J12.4 124.59,74.55 125.22,73.91 129.29,73.91 131.57,71.63 JP12.10
P93
  Bottom 0.254: J12.5 123.32,75.06 124.97,73.41 127.25,73.41 129.03,71.63 JP12.9
P94
  Bottom 0.254: J12.6 122.05,75.56 124.71,72.9 125.22,72.9 126.49,71.63 JP12.8
P95
  Bottom 0.254: J12.7 120.78,74.8 123.95,71.63 JP12.7
P96
  Bottom 0.254: J12.8 119.51,73.53 121.41,71.63 JP12.6
P97
  Bottom 0.254: J13.1 31.92,108.79 38.61,102.11 JP13.13
P98
  Bottom 0.254: J13.2 31.92,106.25 36.07,102.11 JP13.12
P99
  Bottom 0.254: J13.3 25.27,105.28 25.65,104.9 30.73,104.9 33.53,102.11 JP13.11
P100
  Bottom 0.254: J13.4 24,105.03 24.64,104.39 28.7,104.39 30.99,102.11 JP13.10
P101
  Bottom 0.254: J13.5 22.73,105.54 24.38,103.89 26.67,103.89 28.45,102.11 JP13.9
P102
  Bottom 0.254: J13.6 21.46,106.05 24.13,103.38 24.64,103.38 25.91,102.11 JP13.8
P103
  Bottom 0.254: J13.7 20.19,105.28 23.37,102.11 JP13.7
P104
  Bottom 0.254: J13.8 18.92,104.01 20.83,102.11 JP13.6
P105
  Bottom 0.254: J14.1 65.45,108.79 72.14,102.11 JP14.13
P106
  Bottom 0.254: J14.2 65.45,106.25 69.6,102.11 JP14.12
P107
  Bottom 0.254: J14.3 58.8,105.28 59.18,104.9 64.26,104.9 67.06,102.11 JP14.11
P108
  Bottom 0.254: J14.4 57.53,105.03 58.17,104.39 62.23,104.39 64.52,102.11 JP14.10
P109
  Bottom 0.254: J14.5 56.26,105.54 57.91,103.89 60.2,103.89 61.98,102.11 JP14.9
P110
  Bottom 0.254: J14.6 54.99,106.05 57.66,103.38 58.17,103.38 59.44,102.11 JP14.8
P111
  Bottom 0.254: J14.7 53.72,105.28 56.9,102.11 JP14.7
P112
  Bottom 0.254: J14.8 52.45,104.01 54.36,102.11 JP14.6
P113
  Bottom 0.254: J15.1 98.98,108.79 105.66,102.11 JP15.13
P114
  Bottom 0.254: J15.2 98.98,106.25 103.12,102.11 JP15.12
P115
  Bottom 0.254: J15.3 92.33,105.28 92.71,104.9 97.79,104.9 100.58,102.11 JP15.11
P116
  Bottom 0.254: J15.4 91.06,105.03 91.69,104.39 95.76,104.39 98.04,102.11 JP15.10
P117
  Bottom 0.254: J15.5 89.79,105.54 91.44,103.89 93.73,103.89 95.5,102.11 JP15.9
P118
  Bottom 0.254: J15.6 88.52,106.05 91.19,103.38 91.69,103.38 92.96,102.11 JP15.8
P119
  Bottom 0.254: J15.7 87.25,105.28 90.42,102.11 JP15.7
P120
  Bottom 0.254: J15.8 85.98,104.01 87.88,102.11 JP15.6
P121
  Bottom 0.254: J16.1 132.51,108.79 139.19,102.11 JP16.13
P122
  Bottom 0.254: J16.2 132.51,106.25 136.65,102.11 JP16.12
P123
  Bottom 0.254: J16.3 125.86,105.28 126.24,104.9 131.32,104.9 134.11,102.11 JP16.11
P124
  Bottom 0.254: J16.4 124.59,105.03 125.22,104.39 129.29,104.39 131.57,102.11 JP16.10
P125
  Bottom 0.254: J16.5 123.32,105.54 124.97,103.89 127.25,103.89 129.03,102.11 JP16.9
P126
  Bottom 0.254: J16.6 122.05,106.05 124.71,103.38 125.22,103.38 126.49,102.11 JP16.8
P127
  Bottom 0.254: J16.7 120.78,105.28 123.95,102.11 JP16.7
P128
  Bottom 0.254: J16.8 119.51,104.01 121.41,102.11 JP16.6
SH
  pour Top (isolate 0.305): 6.86,29.72 39.88,29.72 39.88,6.86 6.86,6.86
SH1
  pour Top (isolate 0.305): 40.39,29.72 73.41,29.72 73.41,6.86 40.39,6.86
SH2
  pour Top (isolate 0.305): 73.91,29.72 106.93,29.72 106.93,6.86 73.91,6.86
SH3
  pour Top (isolate 0.305): 107.44,29.72 140.46,29.72 140.46,6.86 107.44,6.86
SH4
  pour Top (isolate 0.305): 6.86,60.2 39.88,60.2 39.88,37.34 6.86,37.34
SH5
  pour Top (isolate 0.305): 40.39,60.2 73.41,60.2 73.41,37.34 40.39,37.34
SH6
  pour Top (isolate 0.305): 73.91,60.2 106.93,60.2 106.93,37.34 73.91,37.34
SH7
  pour Top (isolate 0.305): 107.44,60.2 140.46,60.2 140.46,37.34 107.44,37.34
SH8
  pour Top (isolate 0.305): 6.86,90.68 39.88,90.68 39.88,67.82 6.86,67.82
SH9
  pour Top (isolate 0.305): 40.39,90.68 73.41,90.68 73.41,67.82 40.39,67.82
SH10
  pour Top (isolate 0.305): 73.91,90.68 106.93,90.68 106.93,67.82 73.91,67.82
SH11
  pour Top (isolate 0.305): 107.44,90.68 140.46,90.68 140.46,67.82 107.44,67.82
SH12
  pour Top (isolate 0.305): 6.86,121.16 39.88,121.16 39.88,98.3 6.86,98.3
SH13
  pour Top (isolate 0.305): 40.39,121.16 73.41,121.16 73.41,98.3 40.39,98.3
SH14
  pour Top (isolate 0.305): 73.91,121.16 106.93,121.16 106.93,98.3 73.91,98.3
SH15
  pour Top (isolate 0.305): 107.44,121.16 140.46,121.16 140.46,98.3 107.44,98.3
Y+
  Bottom 0.254: J1.9 28.7,26.42 25.91,26.42 16.51,17.02 16.51,12.45 18.29,10.67 JP1.5
Y+1
  Bottom 0.254: J2.9 62.23,26.42 59.44,26.42 50.04,17.02 50.04,12.45 51.82,10.67 JP2.5
Y+2
  Bottom 0.254: J3.9 95.76,26.42 92.96,26.42 83.57,17.02 83.57,12.45 85.34,10.67 JP3.5
Y+3
  Bottom 0.254: J4.9 129.29,26.42 126.49,26.42 117.09,17.02 117.09,12.45 118.87,10.67 JP4.5
Y+4
  Bottom 0.254: J5.9 28.7,56.9 25.91,56.9 16.51,47.5 16.51,42.93 18.29,41.15 JP5.5
Y+5
  Bottom 0.254: J6.9 62.23,56.9 59.44,56.9 50.04,47.5 50.04,42.93 51.82,41.15 JP6.5
Y+6
  Bottom 0.254: J7.9 95.76,56.9 92.96,56.9 83.57,47.5 83.57,42.93 85.34,41.15 JP7.5
Y+7
  Bottom 0.254: J8.9 129.29,56.9 126.49,56.9 117.09,47.5 117.09,42.93 118.87,41.15 JP8.5
Y+8
  Bottom 0.254: J9.9 28.7,87.38 25.91,87.38 16.51,77.98 16.51,73.41 18.29,71.63 JP9.5
Y+9
  Bottom 0.254: J10.9 62.23,87.38 59.44,87.38 50.04,77.98 50.04,73.41 51.82,71.63 JP10.5
Y+10
  Bottom 0.254: J11.9 95.76,87.38 92.96,87.38 83.57,77.98 83.57,73.41 85.34,71.63 JP11.5
Y+11
  Bottom 0.254: J12.9 129.29,87.38 126.49,87.38 117.09,77.98 117.09,73.41 118.87,71.63 JP12.5
Y+12
  Bottom 0.254: J13.9 28.7,117.86 25.91,117.86 16.51,108.46 16.51,103.89 18.29,102.11 JP13.5
Y+13
  Bottom 0.254: J14.9 62.23,117.86 59.44,117.86 50.04,108.46 50.04,103.89 51.82,102.11 JP14.5
Y+14
  Bottom 0.254: J15.9 95.76,117.86 92.96,117.86 83.57,108.46 83.57,103.89 85.34,102.11 JP15.5
Y+15
  Bottom 0.254: J16.9 129.29,117.86 126.49,117.86 117.09,108.46 117.09,103.89 118.87,102.11 JP16.5
Y-
  Bottom 0.254: J1.10 26.17,27.7 15.75,17.27 JP1.4
Y-1
  Bottom 0.254: J2.10 59.7,27.7 49.28,17.27 JP2.4
Y-2
  Bottom 0.254: J3.10 93.23,27.7 82.8,17.27 JP3.4
Y-3
  Bottom 0.254: J4.10 126.76,27.7 116.33,17.27 JP4.4
Y-4
  Bottom 0.254: J5.10 26.17,58.18 15.75,47.75 JP5.4
Y-5
  Bottom 0.254: J6.10 59.7,58.18 49.28,47.75 JP6.4
Y-6
  Bottom 0.254: J7.10 93.23,58.18 82.8,47.75 JP7.4
Y-7
  Bottom 0.254: J8.10 126.76,58.18 116.33,47.75 JP8.4
Y-8
  Bottom 0.254: J9.10 26.17,88.66 15.75,78.23 JP9.4
Y-9
  Bottom 0.254: J10.10 59.7,88.66 49.28,78.23 JP10.4
Y-10
  Bottom 0.254: J11.10 93.23,88.66 82.8,78.23 JP11.4
Y-11
  Bottom 0.254: J12.10 126.76,88.66 116.33,78.23 JP12.4
Y-12
  Bottom 0.254: J13.10 26.17,119.14 15.75,108.71 JP13.4
Y-13
  Bottom 0.254: J14.10 59.7,119.14 49.28,108.71 JP14.4
Y-14
  Bottom 0.254: J15.10 93.23,119.14 82.8,108.71 JP15.4
Y-15
  Bottom 0.254: J16.10 126.76,119.14 116.33,108.71 JP16.4

## Text on the board
Bottom: v12 | v12 | v12 | v12 | v12 | v12 | v12 | v12 | v12 | v12 | v12 | v12 | v12 | v12 | v12 | v12
tPlace: SH | G- | G+ | Y- | Y+ | P8 | P7 | P6 | P5 | P4 | P3 | P2\ | P1 | SH | G- | G+ | Y- | Y+ | P8 | P7 | P6 | P5 | P4 | P3 | P2\ | P1 | SH | G- | G+ | Y- | Y+ | P8 | P7 | P6 | P5 | P4 | P3 | P2\ | P1 | SH | G- | G+ | Y- | Y+ | P8 | P7 | P6 | P5 | P4 | P3 | P2\ | P1 | SH | G- | G+ | Y- | Y+ | P8 | P7 | P6 | P5 | P4 | P3 | P2\ | P1 | SH | G- | G+ | Y- | Y+ | P8 | P7 | P6 | P5 | P4 | P3 | P2\ | P1 | SH | G- | G+ | Y- | Y+ | P8 | P7 | P6 | P5 | P4 | P3 | P2\ | P1 | SH | G- | G+ | Y- | Y+ | P8 | P7 | P6 | P5 | P4 | P3 | P2\ | P1 | SH | G- | G+ | Y- | Y+ | P8 | P7 | P6 | P5 | P4 | P3 | P2\ | P1 | SH | G- | G+ | Y- | Y+ | P8 | P7 | P6 | P5 | P4 | P3 | P2\ | P1 | SH | G- | G+ | Y- | Y+ | P8 | P7 | P6 | P5 | P4 | P3 | P2\ | P1 | SH | G- | G+ | Y- | Y+ | P8 | P7 | P6 | P5 | P4 | P3 | P2\ | P1 | SH | G- | G+ | Y- | Y+ | P8 | P7 | P6 | P5 | P4 | P3 | P2\ | P1 | SH | G- | G+ | Y- | Y+ | P8 | P7 | P6 | P5 | P4 | P3 | P2\ | P1 | SH | G- | G+ | Y- | Y+ | P8 | P7 | P6 | P5 | P4 | P3 | P2\ | P1 | SH | G- | G+ | Y- | Y+ | P8 | P7 | P6 | P5 | P4 | P3 | P2\ | P1
bPlace: RJ45 MagJack / Breakout | RJ45 MagJack / Breakout | RJ45 MagJack / Breakout | RJ45 MagJack / Breakout | SH | G- | G+ | Y- | Y+ | P8 | P7 | P6 | P5 | P4 | P3 | P2\ | P1 | SH | G- | G+ | Y- | Y+ | P8 | P7 | P6 | P5 | P4 | P3 | P2\ | P1 | SH | G- | G+ | Y- | Y+ | P8 | P7 | P6 | P5 | P4 | P3 | P2\ | P1 | SH | G- | G+ | Y- | Y+ | P8 | P7 | P6 | P5 | P4 | P3 | P2\ | P1 | RJ45 MagJack / Breakout | RJ45 MagJack / Breakout | RJ45 MagJack / Breakout | RJ45 MagJack / Breakout | SH | G- | G+ | Y- | Y+ | P8 | P7 | P6 | P5 | P4 | P3 | P2\ | P1 | SH | G- | G+ | Y- | Y+ | P8 | P7 | P6 | P5 | P4 | P3 | P2\ | P1 | SH | G- | G+ | Y- | Y+ | P8 | P7 | P6 | P5 | P4 | P3 | P2\ | P1 | SH | G- | G+ | Y- | Y+ | P8 | P7 | P6 | P5 | P4 | P3 | P2\ | P1 | RJ45 MagJack / Breakout | RJ45 MagJack / Breakout | RJ45 MagJack / Breakout | RJ45 MagJack / Breakout | SH | G- | G+ | Y- | Y+ | P8 | P7 | P6 | P5 | P4 | P3 | P2\ | P1 | SH | G- | G+ | Y- | Y+ | P8 | P7 | P6 | P5 | P4 | P3 | P2\ | P1 | SH | G- | G+ | Y- | Y+ | P8 | P7 | P6 | P5 | P4 | P3 | P2\ | P1 | SH | G- | G+ | Y- | Y+ | P8 | P7 | P6 | P5 | P4 | P3 | P2\ | P1 | RJ45 MagJack / Breakout | RJ45 MagJack / Breakout | RJ45 MagJack / Breakout | RJ45 MagJack / Breakout | SH | G- | G+ | Y- | Y+ | P8 | P7 | P6 | P5 | P4 | P3 | P2\ | P1 | SH | G- | G+ | Y- | Y+ | P8 | P7 | P6 | P5 | P4 | P3 | P2\ | P1 | SH | G- | G+ | Y- | Y+ | P8 | P7 | P6 | P5 | P4 | P3 | P2\ | P1 | SH | G- | G+ | Y- | Y+ | P8 | P7 | P6 | P5 | P4 | P3 | P2\ | P1